# Altium PCB uFMC98_s1.PcbDoc
Units mil, origin at the board's own origin, x right, y up, seen from the top; angles counter-clockwise.
Board outline 1381.92 x 1181.94 mil, 2 copper layers (Top Layer, Bottom Layer); 49 components, 89 nets, 322 pads, 32 vias.
Unrouted connection lines stored in the file: 158.
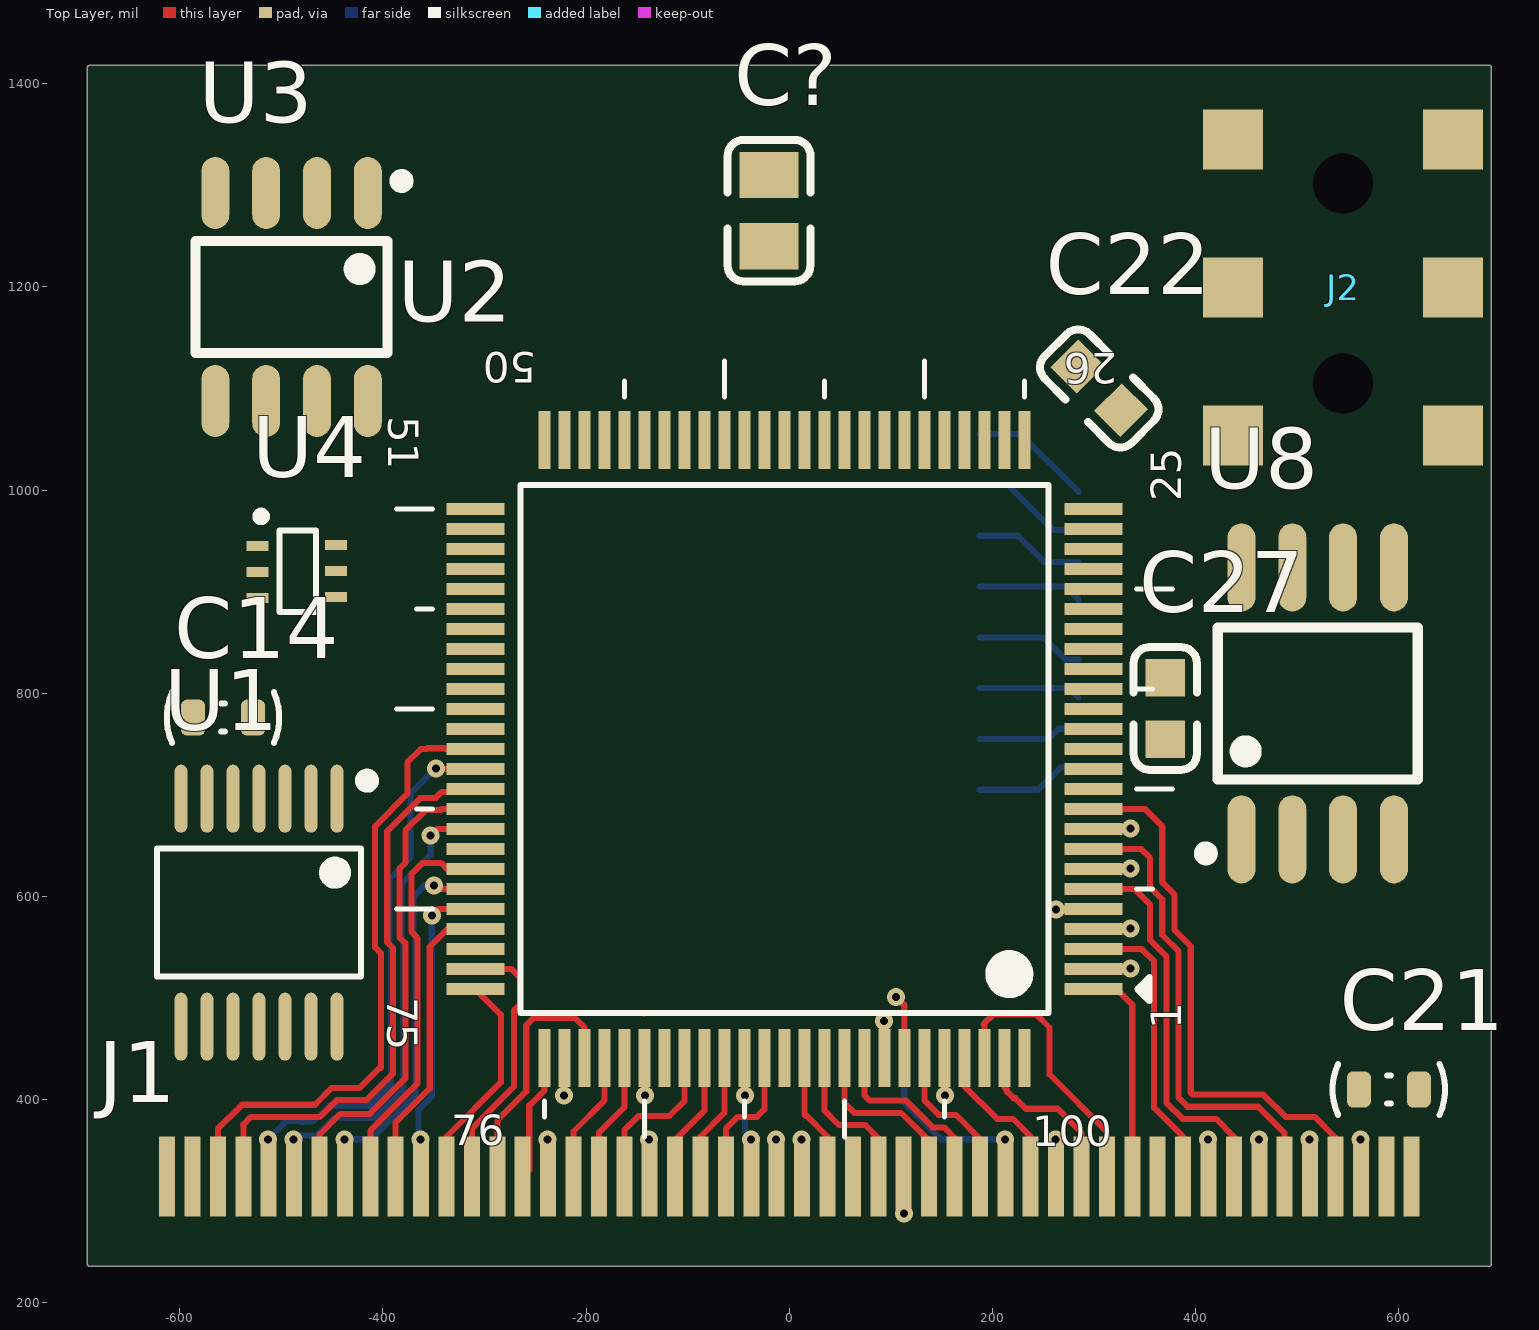
[diagram p0: Top Layer view]
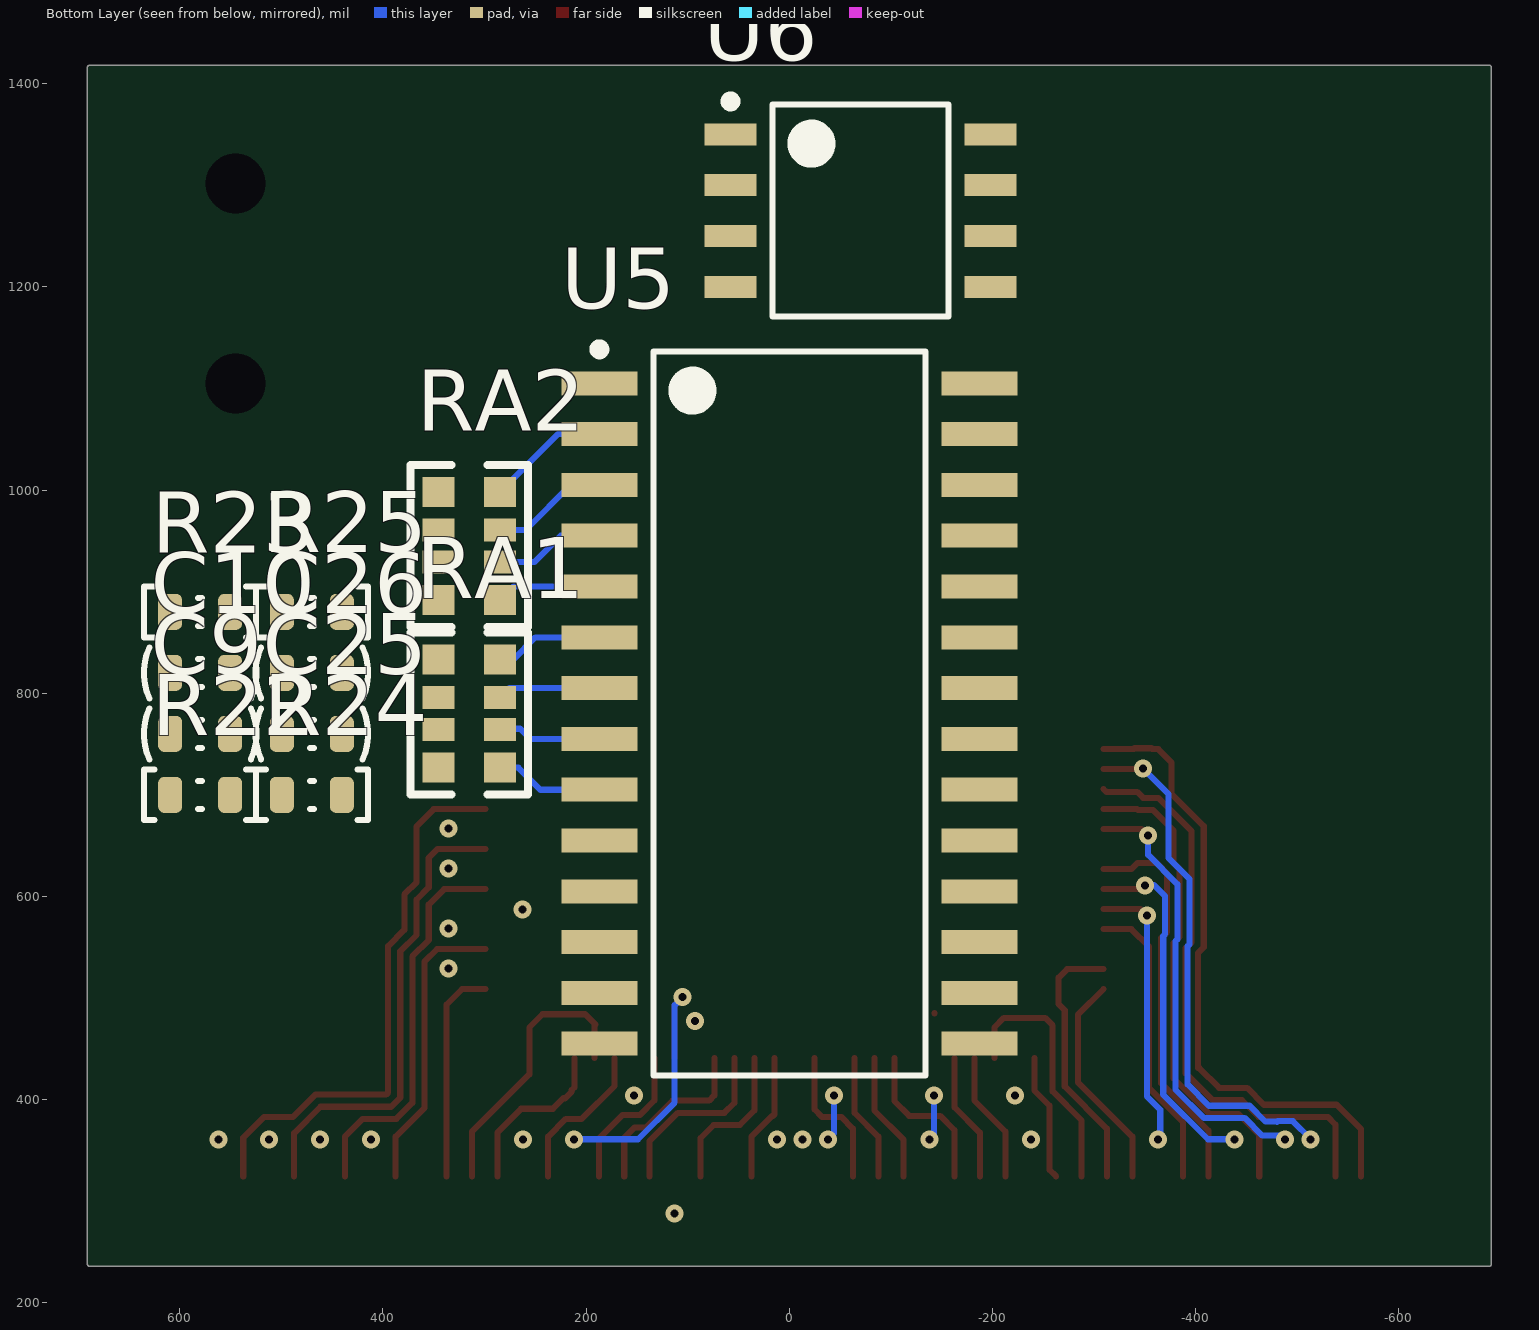
[diagram p1: Bottom Layer view, seen from below]

## Layer stack, top to bottom
Top Solder: solder mask 0.4, Solder Resist, Dk 3.5
Top Layer: signal copper 1.4
Dielectric 1: dielectric 12.6, FR-4, Dk 4.8
Bottom Layer: signal copper 1.4
Bottom Solder: solder mask 0.4, Solder Resist, Dk 3.5

## Board outline
-690.96,238 ccw(c-688.98,238) -688.48,236.08 ccw(c-687.98,238) -687.98,236.02 688.98,236.02 ccw(c688.98,238) 690.96,238 690.96,238.02 690.96,1415.98 ccw(c688.98,1415.98) 688.98,1417.96 -688.98,1417.96 ccw(c-688.98,1415.98) -690.96,1415.98

## Design rules (kind name [scope] priority, off if disabled: settings)
Clearance [All] p1: gap=6 ignorepadtopadclearanceinfootprint=FALSE except(0: Arc-Hole Track-Hole SMDPad-Hole THPad-Hole Via-Hole Fill-Hole Poly-Hole Region-Hole Text-Hole)
PolygonConnect [All] p1: connectstyle=Relief reliefconductorwidth=10 reliefentries=4 polygonreliefangle="90 Angle" airgapwidth=10
RoutingVias [All] p1: holewidth=28 width=50 viastyle="Through Hole" minholewidth=28 minwidth=50 maxholewidth=28 maxwidth=50
SolderMaskExpansion [All] p1: expansion=4
Width [All] p1: maxlimit=50 minlimit=4 preferedwidth=4 minimp=50.000000 maximp=50.000000 favimp=50.000000
30 further rules are at their usual default settings.

## Components (designator, comment, footprint, x,y, rotation, side; value= is the part's Value field where it differs from the comment)
C1 "Cap Pol3" C1210_N 1787,272 r0 top value=22uF
C3 "Cap Pol3" C1210_N 1780,106 r0 top value=22uF
C4 "Cap Pol3" C1210_N 2016,265 r0 top value=22uF
C8 "10uF (106) 10% 25V" 0805_C 1058,1120 r90 top
C9 "Cap" CEIA0603X04N 580,760 r180 bottom value=100nF
C10 "Cap" CEIA0603X04N 580,820 r0 bottom value=100nF
C11 "470nF (474) 10% 25V" 0603_C 205,1640 r180 top
C12 "470nF (474) 10% 25V" 0603_C 205,1560 r180 top
C13 "10uF (106) 10% 25V" 0805_C 1227,1118 r90 top
C14 "Cap" CEIA0603X04N -557.47,776 r0 top value=100nF
C17 "Cap" CEIA0603X04N 1515,265 r90 top value=100nF
C18 "Cap" CEIA0603X04N 1580,265.47 r90 top value=100nF
C19 "Cap" CEIA0603X04N 2176.54,-53.5 r90 top value=?F
C20 "Cap" CEIA0603X04N 1450,265 r90 top value=100nF
C21 "Cap" CEIA0603X04N 590,410 r180 top value=100nF
C22 "100nF (104) 10% 50V" 0603_C 305,1100 r315 top
C25 "Cap" CEIA0603X04N 470,760 r0 bottom value=100nF
C26 "Cap" CEIA0603X04N 470,820 r0 bottom value=100nF
C27 "100nF (104) 10% 50V" 0603_C 370,785 r90 top
C? "22uF (226) 20% 25V" 0805_C -20,1275 r90 top
J1 "CF Card Connector Memory / I/O Type" CF_Card_Female_MI20_21_HRS 0,285 r180 top
J2 "PJ-242" PJ-242 545,1412.09 r270 top locked
L1 "Bead" L2012X10N_LQW21 1320,255 r90 top value=1
R6 "Res1" REIA0603X04N 2260.54,154.5 r0 top value=10K
R7 "Res1" REIA0603X04N 2090.54,154.5 r0 top value=10K
R13 "Res1" REIA0603X04N 1951.54,74.5 r90 top value=10K
R18 "680Ω (6800) ±1%" 0402_R 1039,1236 r90 top
R19 "680Ω (6800) ±1%" 0402_R 986.54,1236.5 r90 top
R21 "470KΩ (4703) ±1%" 0402_R 987,1153 r90 top
R22 "Res1" REIA0603X04N 580,700 r180 bottom value=103
R23 "Res1" REIA0603X04N 580,880 r180 bottom value=103
R24 "Res1" REIA0603X04N 470,700 r180 bottom value=223
R25 "Res1" REIA0603X04N 470,880 r180 bottom value=223
R26 "470KΩ (4703) ±1%" 0402_R 1154,1129 r90 top
R27 "680Ω (6800) ±1%" 0402_R 1155.54,1243.5 r90 top
R28 "680Ω (6800) ±1%" 0402_R 1214,1243 r90 top
R29 "10KΩ (1002) ±1%" 0402_R 261.73,1710 r0 top
R30 "10KΩ (1002) ±1%" 0402_R 158.27,1710 r0 top
R31 "10KΩ (1002) ±1%" 0402_R 160,1500 r0 top
R32 "10KΩ (1002) ±1%" 0402_R 250,1500 r0 top
RA1 "10KΩ (103) ±5%" 0603_Rx4 315,780 r90 bottom
RA2 "10KΩ (103) ±5%" 0603_Rx4 315,945 r90 bottom
U1 "7474" TSSOP-14 -522,584 r180 top
U2 "Z86017/Z16017" VQFP100_TSQFP50P1600X1600X160-100N -5,745 r180 top
U3 "ST93C56_C57" SOIC-8_150mil -490,1190 r180 top
U4 "NL27WZ04" SOT-363 -485,920 r90 top
U5 "YMF288-M SOP28" SOP127P1030X265-28N 0,780 r180 bottom
U6 "uPD6379A_AL" DMP8_SOIC127P680X175-8N -70,1275 r180 bottom
U8 "NJM3414AD/AM/AV" SOIC-8_208mil 520,790 r0 top

## Footprints (in the part's own frame and the unit in brackets; to place one, negate y for a bottom-side part, rotate by r counter-clockwise, add the part's x,y. Pads: shape width x height; smd on the part's side, far side on the other; paste and mask are expansions set on the pad)
0402_R [mm]
  rect 0.6x0.65 smd mask+0.051: 1(-0.425,0) 2(0.425,0)
  silkscreen extent -0.97,-0.58 0.97,0.58, body extent -0.57,-0.27 0.58,0.28, height 0.41
0603_C [mm]
  rect 0.93x0.98 smd: 1(-0.77,0) 2(0.77,0)
  silkscreen extent -1.54,-0.79 1.54,0.79, body extent -0.8,-0.4 0.8,0.4, height 0.3
0603_Rx4 [mm]
  rect 0.75x0.8 smd mask+0.051: 1(-1.35,-0.77) 4(1.35,-0.77) 5(1.35,0.77) 8(-1.35,0.77)
  rect 0.58x0.8 smd mask+0.051: 2(-0.4,-0.77) 3(0.4,-0.77) 6(0.4,0.77) 7(-0.4,0.77)
  silkscreen extent -2.03,-1.47 2.02,1.47, body extent -1.6,-0.8 1.6,0.8, height 0.55
0805_C [mm]
  rect 1.16x1.47 smd: 1(-0.89,0) 2(0.89,0)
  silkscreen extent -1.77,-1.04 1.77,1.04, body extent -1,-0.62 1,0.63, height 0.77
C1210_N [mm] "Chip Capacitor, Body 3.2x2.5mm, IPC Medium Density"
  rect 1.3x2.7 smd: 1(-1.45,0) 2(1.45,0)
  silkscreen extent -0.4,-1.25 0.4,1.25, body extent -1.7,-1.35 1.7,1.35, height 1.5
CEIA0603X04N [mm] "Chip Capacitor, 2-Leads, Body 1.55x0.85mm, Resistorguide Medium Density"
  rrect50% 0.6x0.9 smd: 1(-0.75,0) 2(0.75,0)
  silkscreen extent -1.4,-0.63 1.4,0.63, body extent -0.8,-0.45 0.8,0.45, height 0.45
CF_Card_Female_MI20_21_HRS [mm]
  rect 0.4x2 smd: 1(15.557,-1) 2(14.287,-1) 3(13.018,-1) 4(11.747,-1) 5(10.477,-1) 6(9.207,-1) 7(7.938,-1) 8(6.667,-1) 9(5.397,-1) 10(4.127,-1) 11(2.857,-1) 12(1.588,-1) 13(0.318,-1) 14(-0.952,-1) 15(-2.222,-1) 16(-3.492,-1) 17(-4.763,-1) 18(-6.032,-1) 19(-7.302,-1) 20(-8.572,-1) 21(-9.842,-1) 22(-11.112,-1) 23(-12.383,-1) 24(-13.652,-1) 25(-14.922,-1) 26(14.922,-1) 27(13.652,-1) 28(12.383,-1) 29(11.112,-1) 30(9.842,-1) 31(8.572,-1) 32(7.302,-1) 33(6.032,-1) 34(4.763,-1) 35(3.492,-1) 36(2.222,-1) 37(0.953,-1) 38(-0.317,-1) 39(-1.587,-1) 40(-2.857,-1) 41(-4.127,-1) 42(-5.397,-1) 43(-6.667,-1) 44(-7.938,-1) 45(-9.207,-1) 46(-10.477,-1) 47(-11.747,-1) 48(-13.018,-1) 49(-14.287,-1) 50(-15.557,-1)
DMP8_SOIC127P680X175-8N [mm] "SOIC, 8-Leads, Body 5.00x5.00mm, Pitch 1.27mm, IPC Medium Density"
  rect 1.3x0.55 smd: 1(-3.25,1.905) 2(-3.25,0.635) 3(-3.25,-0.635) 4(-3.25,-1.905) 5(3.25,-1.905) 6(3.25,-0.635) 7(3.25,0.635) 8(3.25,1.905)
  silkscreen extent -3.37,-2.65 2.2,2.85, body extent -3.4,-2.65 3.4,2.65, height 1.75
L2012X10N_LQW21 [mm] "Chip Inductor, 2-Leads, Body 2.00x1.20mm, IPC Medium Density, Murata LQW21 Series"
  rect 0.98x1.34 smd: 1(-0.94,0) 2(0.94,0)
  silkscreen extent -0.05,-0.57 0.05,0.57, body extent -1.05,-0.65 1.05,0.65, height 1
PJ-242 [mm]
  round 0 hole 1.5: 0(2.8,0) 0(7.8,0)
  rect 1.5x1.5 smd: 2(1.7,2.75) 3(5.4,2.75) 4(9.1,2.75) 5(1.7,-2.75) 6(5.4,-2.75) 7(9.1,-2.75)
  body extent -1.5,-2.5 10.5,2.5, height 3.6
REIA0603X04N [mm] "Chip Resistor, 2-Leads, Body 1.55x0.85mm, Resistorguide Medium Density"
  rrect50% 0.6x0.9 smd: 1(-0.75,0) 2(0.75,0)
  silkscreen extent -1.4,-0.64 1.4,0.64, body extent -0.8,-0.45 0.8,0.45, height 0.45
SOIC-8_150mil [mm]
  oval 0.7x1.8 smd: 1(-1.905,-2.6) 2(-0.635,-2.6) 3(0.635,-2.6) 4(1.905,-2.6) 5(1.905,2.6) 6(0.635,2.6) 7(-0.635,2.6) 8(-1.905,2.6)
  silkscreen extent -2.9,-3.05 2.4,1.4
SOIC-8_208mil [mm]
  oval 0.7x2.2 smd: 1(-1.905,-3.4) 2(-0.635,-3.4) 3(0.635,-3.4) 4(1.905,-3.4) 5(1.905,3.4) 6(0.635,3.4) 7(-0.635,3.4) 8(-1.905,3.4)
  silkscreen extent -2.95,-3.9 2.5,1.9
SOP127P1030X265-28N [mm] "SOP, 28-Leads, Body 17.90x7.50mm, Pitch 1.27mm, IPC Medium Density"
  rect 1.9x0.6 smd: 1(-4.75,8.255) 2(-4.75,6.985) 3(-4.75,5.715) 4(-4.75,4.445) 5(-4.75,3.175) 6(-4.75,1.905) 7(-4.75,0.635) 8(-4.75,-0.635) 9(-4.75,-1.905) 10(-4.75,-3.175) 11(-4.75,-4.445) 12(-4.75,-5.715) 13(-4.75,-6.985) 14(-4.75,-8.255) 15(4.75,-8.255) 16(4.75,-6.985) 17(4.75,-5.715) 18(4.75,-4.445) 19(4.75,-3.175) 20(4.75,-1.905) 21(4.75,-0.635) 22(4.75,0.635) 23(4.75,1.905) 24(4.75,3.175) 25(4.75,4.445) 26(4.75,5.715) 27(4.75,6.985) 28(4.75,8.255)
  silkscreen extent -4.88,-9.05 3.4,9.23, body extent -5.16,-9.05 5.16,9.05, height 2.65
SOT-363 [mm] "SOT-23/SC-74A; 5 Leads; Body 3.1 x 3 mm, inc. leads (LxW max)"
  rect 0.25x0.55 smd: 1(0.637,0.98) 2(-0.013,0.98) 3(-0.663,0.98) 4(-0.637,-0.98) 5(0.013,-0.98) 6(0.663,-0.98)
  silkscreen extent -1.02,-0.48 1.46,0.98
TSSOP-14 [mm]
  oval 0.32x1.7 smd: 1(-1.95,-2.85) 2(-1.3,-2.85) 3(-0.65,-2.85) 4(0,-2.85) 5(0.65,-2.85) 6(1.3,-2.85) 7(1.95,-2.85) 8(1.95,2.85) 9(1.3,2.85) 10(0.65,2.85) 11(0,2.85) 12(-0.65,2.85) 13(-1.3,2.85) 14(-1.95,2.85)
  silkscreen extent -2.85,-3.45 2.55,1.6
VQFP100_TSQFP50P1600X1600X160-100N [mm] "TSQFP, 100-Leads, Body 14.00x14.00mm, Pitch 0.50mm, IPC Medium Density"
  rect 1.45x0.3 smd: 1(-7.725,6) 2(-7.725,5.5) 3(-7.725,5) 4(-7.725,4.5) 5(-7.725,4) 6(-7.725,3.5) 7(-7.725,3) 8(-7.725,2.5) 9(-7.725,2) 10(-7.725,1.5) 11(-7.725,1) 12(-7.725,0.5) 13(-7.725,0) 14(-7.725,-0.5) 15(-7.725,-1) 16(-7.725,-1.5) 17(-7.725,-2) 18(-7.725,-2.5) 19(-7.725,-3) 20(-7.725,-3.5) 21(-7.725,-4) 22(-7.725,-4.5) 23(-7.725,-5) 24(-7.725,-5.5) 25(-7.725,-6) 51(7.725,-6) 52(7.725,-5.5) 53(7.725,-5) 54(7.725,-4.5) 55(7.725,-4) 56(7.725,-3.5) 57(7.725,-3) 58(7.725,-2.5) 59(7.725,-2) 60(7.725,-1.5) 61(7.725,-1) 62(7.725,-0.5) 63(7.725,0) 64(7.725,0.5) 65(7.725,1) 66(7.725,1.5) 67(7.725,2) 68(7.725,2.5) 69(7.725,3) 70(7.725,3.5) 71(7.725,4) 72(7.725,4.5) 73(7.725,5) 74(7.725,5.5) 75(7.725,6)
  rect 0.3x1.45 smd: 26(-6,-7.725) 27(-5.5,-7.725) 28(-5,-7.725) 29(-4.5,-7.725) 30(-4,-7.725) 31(-3.5,-7.725) 32(-3,-7.725) 33(-2.5,-7.725) 34(-2,-7.725) 35(-1.5,-7.725) 36(-1,-7.725) 37(-0.5,-7.725) 38(0,-7.725) 39(0.5,-7.725) 40(1,-7.725) 41(1.5,-7.725) 42(2,-7.725) 43(2.5,-7.725) 44(3,-7.725) 45(3.5,-7.725) 46(4,-7.725) 47(4.5,-7.725) 48(5,-7.725) 49(5.5,-7.725) 50(6,-7.725) 76(6,7.725) 77(5.5,7.725) 78(5,7.725) 79(4.5,7.725) 80(4,7.725) 81(3.5,7.725) 82(3,7.725) 83(2.5,7.725) 84(2,7.725) 85(1.5,7.725) 86(1,7.725) 87(0.5,7.725) 88(0,7.725) 89(-0.5,7.725) 90(-1,7.725) 91(-1.5,7.725) 92(-2,7.725) 93(-2.5,7.725) 94(-3,7.725) 95(-3.5,7.725) 96(-4,7.725) 97(-4.5,7.725) 98(-5,7.725) 99(-5.5,7.725) 100(-6,7.725)
  silkscreen extent -9.7,-9.7 9.7,9.7, body extent -8,-8 8,8, height 1.6

## Part data
C1 C3 C4: "Polarized Capacitor (Surface Mount)", LatestRevisionDate=29-May-2009, LatestRevisionNote="IPC-7351 Footprint Added.", PackageDescription="Chip Capacitor", PackageReference=C0805, Published=8-Jun-2000, Publisher="Altium Limited"
C8 C13: library part "0805 10uF (106) 10% 25V", "贴片电容", Package=0805, SuppliersPartNumber=C15850, ComponentLink1Description=供应商, ComponentLink1URL=http://www.szlcsc.com/product/details_16532.html, Supplier=LC
C9 C10 C14 C17 C18 C19 C20 C21 C25 C26: "Capacitor", LatestRevisionDate=17-Jul-2002, LatestRevisionNote="Re-released for DXP Platform.", PackageDescription="Radial Cap, Thru-Hole; 2 Leads; 0.3 in Pin Spacing", PackageReference=RAD-0.3, Published=8-Jun-2000, Publisher="Altium Limited"
C11 C12: library part "0603 470nF (474) 10% 25V", "贴片电容", Package=0603, SuppliersPartNumber=C1623, ComponentLink1Description=供应商链接, ComponentLink1URL=http://www.szlcsc.com/product/details_1975.html, Supplier=LC
C22 C27: library part "0603 100nF (104) 10% 50V", "贴片电容", Package=0603, SuppliersPartNumber=C14663, ComponentLink1Description=供应商链接, ComponentLink1URL=http://www.szlcsc.com/product/details_15331.html, Supplier=LC
C?: library part "0805 22uF (226) 20% 25V", "贴片电容", Package=0805, SuppliersPartNumber=C45783, ComponentLink1Description=供应商链接, ComponentLink1URL=http://www.szlcsc.com/product/details_46786.html, Supplier=LC
J1: library part CF_Conn_MEM_IO
J2: "2.5mm Headphone Jack"
L1: library part Inductor, "Inductor", Code_IEC=1005, Code_JEITA=0402, LatestRevisionDate=29-May-2009, LatestRevisionNote="IPC-7351 Footprint Added.", PackageDescription="Chip Inductor", PackageReference=0402-A, Published=8-Jun-2000, Publisher="Altium Limited"
R6 R7 R13 R22 R23 R24 R25: "Resistor", LatestRevisionDate=17-Jul-2002, LatestRevisionNote="Re-released for DXP Platform.", PackageDescription="Axial Device, Thru-Hole; 2 Leads; 0.3 in Pin Spacing", PackageReference=AXIAL-0.3, Published=8-Jun-2000, Publisher="Altium Limited"
R18 R19 R27 R28: library part "0402 680Ω (6800) 1%", "贴片电阻", Package=0402, SuppliersPartNumber=C25130, ComponentLink1Description=供应商, ComponentLink1URL=http://www.szlcsc.com/product/details_25873.html, Supplier=LC
R21 R26: library part "0402 470KΩ (4703) 1%", "贴片电阻", Package=0402, SuppliersPartNumber=C25790, ComponentLink1Description=供应商, ComponentLink1URL=http://www.szlcsc.com/product/details_26533.html, Supplier=LC
R29 R30 R31 R32: library part "0402 10KΩ (1002) 1%", "贴片电阻", Package=0402, SuppliersPartNumber=C25744, ComponentLink1Description=供应商链接, ComponentLink1URL=http://www.szlcsc.com/product/details_26487.html, Supplier=LC
RA1 RA2: library part "0603*4  10KΩ (103) 5%", "贴片排阻", Package=0603*4, SuppliersPartNumber=C29718, ComponentLink1Description=供应商, ComponentLink1URL=http://www.szlcsc.com/product/details_30472.html, Supplier=LC
U1: library part 7474_J_N_1, "Dual D-Type Positive-Edge-Triggered Flip-Flops With Preset And Clear"
U2: library part ZX6017
U3: "2K (128 x 16 or 256 x 8) SERIAL MICROWIRE EEPROM"
U4: "Dual Inverter"
U5: library part YMF288_M
U6: "2-CHANNEL 16-BIT D/A CONVERTER FOR AUDIO APPLICATION"
U8: library part NJM3414AD_AM_AV_1, "Single-Supply Dual High Current Operational Amplifier"

## Via types
v1: diameter 17.72, hole 7.87, Top Layer to Bottom Layer, 31 vias
v2: diameter 35.43, hole 23.62, Top Layer to Bottom Layer, 1 vias

## Nets (pads, with @x,y where several pads share a name; then routed paths per layer and width w, separated by ;. In a path a pad name is that pad's centre, name@x,y a point inside that pad or via, vN(x,y) a via of type N, cw(c..) or ccw(c..) an arc to the next point about the centre after c; other vN are vias at no path point)
5V: C1.1 C14.2 C17.2 C18.2 C20.2 C21.2 C22.2 J1.13 J1.38 L1.2 R6.2 R7.2 R13.2 R29.2 R32.2 RA1.5 RA1.6 RA1.7 RA1.8 RA2.5 RA2.6 RA2.7 RA2.8 U1.1 U1.4 U1.10 U1.12 U1.14 U2.14 U2.24 U2.38 U2.62 U2.73 U2.82 U2.93 U3.8 U4.5 U5.12 U5.22 U5.27
  other v1: -13,361 12,361 92.93,477.5
A5V: C3.1 C4.1 C27.2 L1.1 U6.8 U8.8
ATA_A0: U2.40 U5.20
ATA_A1: U2.39 U5.21
ATA_C\S\: U2.42 U5.17
ATA_D0: RA2.4 U2.30 U5.2 | length 121.2
  Bottom Layer w6: U5.2 227.83,1055 RA2.4
ATA_D1: RA2.3 U2.28 U5.3 | length 116
  Bottom Layer w6: U5.3 215,1005 259.25,960.75 RA2.3
ATA_D2: RA2.2 U2.26 U5.4 | length 108.3
  Bottom Layer w6: U5.4 225,955 250.75,929.25 RA2.2
ATA_D3: RA2.1 U2.23 U5.5 | length 103.1
  Bottom Layer w6: U5.5 271.54,905 RA2.1
ATA_D4: RA1.4 U2.21 U5.6 | length 106.7
  Bottom Layer w6: U5.6 250,855 271.85,833.15 RA1.4
ATA_D5: RA1.3 U2.18 U5.7 | length 101.5
  Bottom Layer w6: U5.7 275.43,805 RA1.3
ATA_D6: RA1.2 U2.16 U5.8 | length 102.1
  Bottom Layer w6: U5.8 255,755 265,765 283.94,765 RA1.2
ATA_D7: RA1.1 U2.12 U5.9 | length 106.7
  Bottom Layer w6: U5.9 245,705 266.85,726.85 RA1.1
ATA_IRQ: U2.36 U4.6
ATA_R\D\: U2.34 U5.19
ATA_W\R\: U2.33 U5.18
GND: C1.2 C3.2 C4.2 C9.1 C10.2 C14.1 C17.1 C18.1 C19.1 C20.1 C21.1 C22.1 C27.1 C?.1 J1.1 J1.25 J1.26 J1.40 J1.50 J2.2 J2.5 R21.2 R26.1 R30.1 R31.1 U1.7 U2.5 U2.15 U2.20 U2.32 U2.44 U2.68 U2.77 U2.88 U3.5 U3.6 U4.2 U5.1 U5.14 U5.16 U6.3 U8.4
  other v1: 113,287.74 -222.04,404.24 262.5,587.02
NetC8_1: C8.1 C25.1 R24.2 U8.1
NetC8_2: C8.2 R18.1 R19.1 | length 52.7
  Top Layer w6: R19.1 987.03,1219.27 R18.1
NetC9_2: C9.2 R22.1
NetC10_1: C10.1 R23.1
NetC11_1: C11.1 U6.4
NetC11_2: C11.2 R29.1 R30.2 U8.3
NetC12_1: C12.1 U6.1
NetC12_2: C12.2 R31.2 R32.1 U8.5
NetC13_1: C13.1 C26.1 R25.2 U8.7
NetC13_2: C13.2 R27.2 R28.2
NetC19_2: C19.2 U2.56
NetC25_2: C25.2 R22.2 R24.1 U8.2
NetC26_2: C26.2 R23.2 R25.1 U8.6
NetC?_2: C?.2 U6.2
NetJ1_24: J1.24 U2.10 | length 547.6
  Top Layer w6: U2.10 350.06,685.94 367,669 367,613.94 379,601.94 379,567 395,551 395,406.91 396.93,404.99 466.49,404.99 488.47,383 517,383 537.5,362.5 J1.24
NetJ2_3: J2.3 R26.2 R27.1 R28.1
NetJ2_6: J2.6 R18.2 R19.2 R21.1 | length 52.7
  Top Layer w6: R19.2 1038.5,1253.23 R18.2
NetR7_1: R7.1 U2.51
NetU1_2: U1.2 U1.6
NetU1_5: U1.5 U2.58
NetU1_9: U1.9 U5.11
NetU1_11: U1.11 U4.4
NetU1_13: U1.13 U2.11
NetU2_50: U2.50 U3.2
NetU2_52: U2.52 U3.1
NetU2_53: U2.53 U3.3
NetU2_54: U2.54 U3.4
PC_A0: J1.20 U2.1 | length 213.8
  Top Layer w6: U2.1 322.22,508.78 337.5,493.5 J1.20
PC_A1: J1.19 U2.99 | length 167.2
  Top Layer w5.98: U2.99 211.54,412.18 214.31,409.4 214.31,407.77 220.76,401.32 222.39,401.32 232.71,391 264,391 287.5,367.5 J1.19
PC_A2: J1.18 U2.97 | length 152.7
  Top Layer w5.98: U2.97 172.17,413.39 204.55,381 220.08,381 237.5,363.58 J1.18
PC_A3: J1.17 U2.95 | length 149.1
  Top Layer w5.98: U2.95 132.8,399.18 146.97,385 164,385 187.5,361.5 J1.17
PC_A4: J1.16 U2.91 | length 177.9
  Top Layer w5.98: U2.91 54.06,396.94 64,387 109.83,387 137.5,359.33 J1.16
PC_A5: J1.15 U2.90 | length 153.7
  Top Layer w5.98: U2.90 34.37,389.34 48.7,375.02 74.65,375.02 87.5,362.17 J1.15
PC_A6: J1.14 U2.89 | length 126.6
  Top Layer w5.98: U2.89 14.69,385.31 16,384 17.08,384 37.5,363.58 J1.14
PC_A7: J1.12 U2.87 | length 143.3
  Top Layer w5.98: J1.12 -62.5,371.5 -51,383 -32,383 -24.69,390.32 U2.87
PC_A8: J1.11 U2.84 | length 128.4
  Top Layer w5.98: J1.11 -112.5,360.5 -83.74,389.26 U2.84
PC_A9: J1.10 U2.83 | length 158.8
  Top Layer w5.98: J1.10 -162.5,369.87 -148.37,384 -118,384 -103.43,398.57 U2.83
PC_A10: J1.8 U2.76 | length 125.3
  Top Layer w5.98: J1.8 -256.03,330.84 -256.03,394.12 -241.22,408.93 U2.76
PC_C\E\1\: J1.7 U2.74 | length 262.9
  Top Layer w5.98: J1.7 -312.5,371.55 -271,413.05 -271,488 -265,494 -265,520 -273.46,528.46 U2.74
PC_C\E\2\: J1.27 J1.32 U2.65 U2.78 | length 818.8
  Top Layer w5.98: J1.27 -537.5,375.46 ; -348.08,697 -342.23,702.85 -311.91,702.85 U2.65 ; J1.32 -287.5,379.6 -259,408.1 -259,473.09 -251.68,480.41 -211.07,480.41 -201.85,471.19 U2.78
  Top Layer w6: -537.5,375.46 -529.96,383 -461.97,383 -445.46,399.51 -416.51,399.51 -390.04,425.97 -390.04,549.11 -395.84,554.91 -395.84,664.17 -363.01,697 -348.08,697
PC_D0: J1.21 U2.3 | length 288.3
  Top Layer w6: U2.3 346.85,548.15 359,536 359,392 387.5,363.5 J1.21
PC_D1: J1.22 U2.6 | length 383.3
  Top Layer w6: U2.6 339.8,607.2 355,592 355,557.06 371,541.06 371,396.97 386.99,380.99 420.01,380.99 437.5,363.5 J1.22
PC_D2: J1.23 U2.8 | length 468.7
  Top Layer w6: U2.8 346.43,646.57 355,638 355,608.97 367,596.97 367,562.03 383,546.03 383,401.94 391.96,392.99 461.51,392.99 487.5,367 J1.23
PC_D3: J1.2 U2.63 | length 621.6
  Top Layer w5.98: J1.2 -562.5,371.13 -541,392.63 ; -357.08,745 -356.23,745.86 -339.77,745.86 -338.92,745 U2.63
  Top Layer w6: -541,392.63 -538.63,395 -466.94,395 -450.44,411.51 -423,411.51 -403.56,430.94 -402.04,430.94 -402.04,544.14 -407.84,549.94 -407.84,669.14 -376,700.98 -376,732 -363,745 -357.08,745
PC_D4: J1.3 U2.64 | length 514.1
  Top Layer w5.98: v1(-348,726) -347.31,725.31 U2.64
  Bottom Layer w6: v1(-513,361) -513,361.26 -495.4,378.86 -480.6,378.86 -479.87,378.13 -479.51,378.49 -468.49,378.49 -452.97,394 -412.94,394 -392,414.94 -392,551.06 -393.86,552.92 -393.86,617.11 -373,637.97 -373,701 v1(-348,726)
PC_D5: J1.4 U2.66 | length 475
  Top Layer w5.98: U2.66@-325,685.94 U2.66
  Top Layer w6: J1.4 -462.5,365.5 -442.01,385.99 -413.05,385.99 -378.04,421 -378.04,554.08 -383.84,559.88 -383.84,627.12 -378.04,632.92 -378.04,665 ; -378,665 -358,685 -343.11,685 -342.17,685.94 U2.66@-325,685.94
PC_D6: J1.5 U2.69 | length 389.2
  Top Layer w5.98: J1.5 -412.5,369.58 -366,416.08 -366,559 -371.85,564.85 -371.85,622.15 -361,633 -342.72,633 -336.61,626.89 U2.69
PC_D7: J1.6 U2.71 | length 271.8
  Top Layer w6: v1(-352,581) -345.48,587.52 U2.71
  Bottom Layer w6: v1(-363,361) -365,363 -365,390 -352,403 v1(-352,581)
PC_D8: J1.47 U2.4
  other v1: 462,361 335.76,568.33
PC_D9: J1.48 U2.7
  other v1: 512,361 335.76,627.39
PC_D10: J1.49 U2.9
  other v1: 562,361 335.76,666.76
PC_D12: J1.28 U2.67 | length 437.5
  Top Layer w5.98: v1(-353,660) -346.74,666.26 U2.67
  Bottom Layer w6: v1(-488,361) -484.5,364.5 -465.5,364.5 -448,382 -407.97,382 -380,409.97 -380,556.03 -381.86,557.89 -381.86,612.14 -353,641 v1(-353,660)
PC_D13: J1.29 U2.70 | length 350.9
  Top Layer w6: v1(-350,611) -346.2,607.2 U2.70
  Bottom Layer w6: v1(-438,361) -412,361 -368,405 -368,561 -369.86,562.86 -369.86,600.14 -359,611 v1(-350,611)
PC_D14: J1.30 U2.72 | length 292
  Top Layer w5.98: J1.30 -387.5,377.63 -354,411.13 -354,550.45 -336.61,567.83 U2.72
PC_D15: J1.31 U2.75 | length 217
  Top Layer w5.98: J1.31 -337.5,363.5 -284,417 -284,483.65 U2.75
PC_H\W\E\: J1.36 U2.85 | length 126.2
  Top Layer w5.98: J1.36 -87.5,363.5 -64.06,386.94 U2.85
PC_I\N\P\A\C\K\: J1.43 U2.96
  other v1: 262,361 152.98,404.24
PC_I\O\R\D\: J1.34 U2.80 | length 126.9
  Top Layer w5.98: J1.34 -187.5,367.5 -162.48,392.52 U2.80
PC_I\O\W\R\: J1.35 U2.81 | length 45.3
  Top Layer w5.98: -143,485 -142.8,484.8
  Bottom Layer w6: v1(-142.3,404.24) -142.3,365.3 v1(-138,361)
  other v2: -1121,750
PC_I\R\E\Q\: J1.37 U2.86 | length 45.7
  Bottom Layer w6: v1(-43.87,404.24) -43.87,366.87 v1(-38,361)
PC_O\E\: J1.9 R6.1 U2.79 | length 129.1
  Top Layer w5.98: J1.9 -212.5,368.61 -182.17,398.95 U2.79
PC_R\E\G\: J1.44 U2.98 | length 278
  Top Layer w6: U2.98 191.85,473.15 191,474 201,484 243,484 256,471 256,425 312.5,368.5 J1.44
PC_RESET: J1.41 U2.92 | length 180.8
  Top Layer w6: U2.92 73.74,404.25 79,398.99 114.8,398.99 141.05,372.74 152.26,372.74 162.5,362.5 J1.41
PC_SPKR: J1.45 U2.100
PC_STSCHG: J1.46 U2.2
  other v1: 412,361 335.76,528.96
PC_W\A\I\T\: J1.42 U2.94 | length 284.7
  Top Layer w6: v1(105,501) 113.11,492.89 U2.94
  Bottom Layer w6: v1(105,501) 113,493 113,397 149,361 v1(212,361)
YM_BCO: U5.23 U6.7
YM_I\R\Q\: R13.1 U4.1 U5.15
YM_LRO: U5.26 U6.5
YM_MCLK: U1.3 U5.28
YM_SO: U5.24 U6.6
YM_WCO: U4.3 U5.25
pads on no net: J1.33 J1.39 J2.0 J2.4 J2.7 U1.8 U2.13 U2.17 U2.19 U2.22 U2.25 U2.27 U2.29 U2.31 U2.35 U2.37 U2.41 U2.43 U2.45 U2.46 U2.47 U2.48 U2.49 U2.55 U2.57 U2.59 U2.60 U2.61 U3.7 U5.10 U5.13
copper on no net:
  other v1: -238,361

## Silkscreen, mask and mechanical layers (free items; w line width, h text height)
Mechanical 1:
  lines w3.94: -689,1416 -688.98,1415.98 ; -688.98,237 -687.98,238 688.98,238 688.98,1415.98 -688.98,1415.98 ; -688.98,238 -688.98,1415.98 ; -688.98,354.33 688.98,354.33 ; 0,-78.74 0,708.66 0,1496.06 ; -846.46,0 846.46,1417.32 ; -846.46,0 -846.46,1417.32 ; -846.46,0 846.46,0 ; -846.46,1417.32 846.46,0 ; -846.46,1417.32 846.46,1417.32 ; 846.46,0 846.46,1417.32

## Text inside footprints (layer, text, board x,y; h text height)
J1: Mechanical 1 "Recommended PCB Thickness 0.4" at 421.26,249.57 h30 r180
U2: Top Overlay "100" at 239.09,354.25 h30; Top Overlay "75" at -395.75,500.91 h30 r270; Top Overlay "50" at -249.09,1135.75 h30 r180; Top Overlay "76" at -332.76,355.24 h30; Top Overlay "51" at -394.76,1072.76 h30 r270; Top Overlay "26" at 322.76,1134.76 h30 r180; Top Overlay "25" at 385.75,989.09 h30 r90; Top Overlay "1" at 385.75,469.41 h30 r90